# Altium PCB 电路板.PcbDoc
Units mil, origin at the board's own origin, x right, y up, seen from the top; angles counter-clockwise.
Board outline 6000 x 4000 mil, 2 copper layers (Top Layer, Bottom Layer); 2 components, 0 nets, 58 pads, 0 vias.
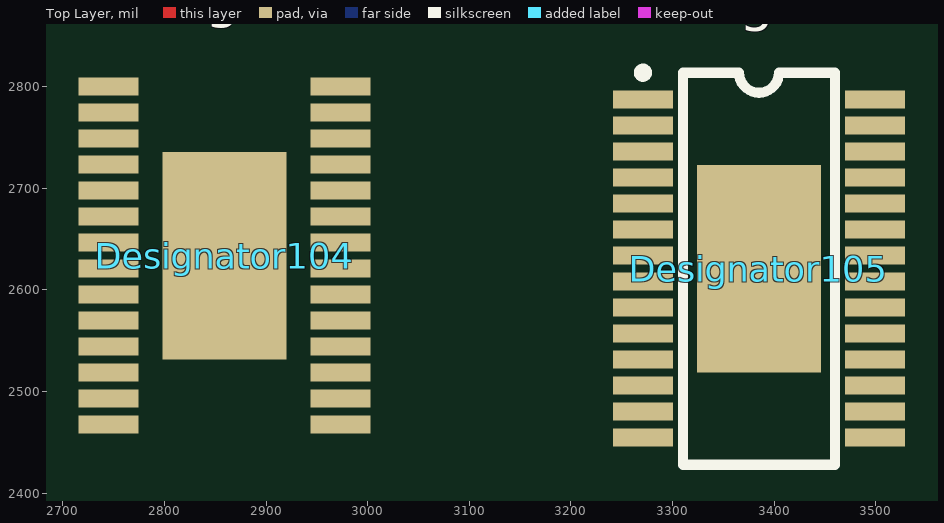
[diagram p0: Top Layer view]
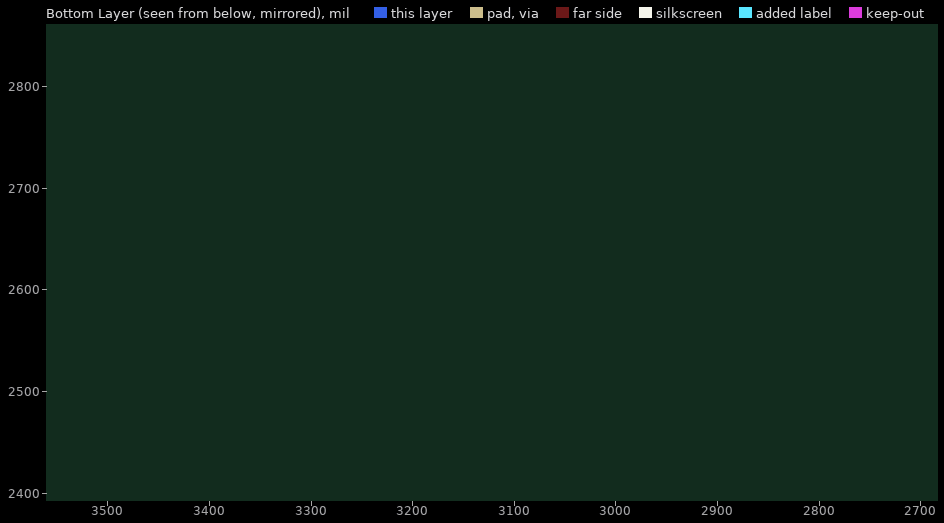
[diagram p1: Bottom Layer view, seen from below]

## Layer stack, top to bottom
Top Solder: solder mask 0.4, Solder Resist, Dk 3.5
Top Layer: signal copper 1.4
Dielectric 1: dielectric 12.6, FR-4, Dk 4.8
Bottom Layer: signal copper 1.4
Bottom Solder: solder mask 0.4, Solder Resist, Dk 3.5

## Board outline
1000,1000 7000,1000 7000,5000 1000,5000

## Design rules (kind name [scope] priority, off if disabled: settings)
Clearance [All] p1: gap=10 ignorepadtopadclearanceinfootprint=FALSE except(0: Arc-Hole Track-Hole SMDPad-Hole THPad-Hole Via-Hole Fill-Hole Poly-Hole Region-Hole Text-Hole)
PolygonConnect [All] p1: connectstyle=Relief reliefconductorwidth=10 reliefentries=4 polygonreliefangle="90 Angle" airgapwidth=10
RoutingVias [All] p1: holewidth=28 width=50 viastyle="Through Hole" minholewidth=28 minwidth=50 maxholewidth=28 maxwidth=50
SolderMaskExpansion [All] p1: expansion=4
Width [All] p1: maxlimit=10 minlimit=10 preferedwidth=10
30 further rules are at their usual default settings.

## Components (designator, comment, footprint, x,y, rotation, side; value= is the part's Value field where it differs from the comment)
Designator104 "Comment" TSSOP28-PowerPad#1 2745,2800 r0 top
Designator105 "Comment" TSSOP28-PowerPad#2 3385,2620.87 r0 top

## Footprints (in the part's own frame and the unit in brackets; to place one, negate y for a bottom-side part, rotate by r counter-clockwise, add the part's x,y. Pads: shape width x height; smd on the part's side, far side on the other; paste and mask are expansions set on the pad)
TSSOP28-PowerPad#1 [mm]
  rect 1.5x0.45 smd: 1(0,0) 2(0,-0.65) 3(0,-1.3) 4(0,-1.95) 5(0,-2.6) 6(0,-3.25) 7(0,-3.9) 8(0,-4.55) 9(0,-5.2) 10(0,-5.85) 11(0,-6.5) 12(0,-7.15) 13(0,-7.8) 14(0,-8.45) 15(5.8,-8.45) 16(5.8,-7.8) 17(5.8,-7.15) 18(5.8,-6.5) 19(5.8,-5.85) 20(5.8,-5.2) 21(5.8,-4.55) 22(5.8,-3.9) 23(5.8,-3.25) 24(5.8,-2.6) 25(5.8,-1.95) 26(5.8,-1.3) 27(5.8,-0.65) 28(5.8,0)
  rect 3.1x5.18 smd: 29(2.9,-4.225)
  body extent -0.3,-9.12 6.1,0.68, height 1.03
TSSOP28-PowerPad#2 [mm]
  rect 1.5x0.45 smd: 1(-2.9,4.225) 2(-2.9,3.575) 3(-2.9,2.925) 4(-2.9,2.275) 5(-2.9,1.625) 6(-2.9,0.975) 7(-2.9,0.325) 8(-2.9,-0.325) 9(-2.9,-0.975) 10(-2.9,-1.625) 11(-2.9,-2.275) 12(-2.9,-2.925) 13(-2.9,-3.575) 14(-2.9,-4.225) 15(2.9,-4.225) 16(2.9,-3.575) 17(2.9,-2.925) 18(2.9,-2.275) 19(2.9,-1.625) 20(2.9,-0.975) 21(2.9,-0.325) 22(2.9,0.325) 23(2.9,0.975) 24(2.9,1.625) 25(2.9,2.275) 26(2.9,2.925) 27(2.9,3.575) 28(2.9,4.225)
  rect 3.1x5.18 smd: 29(0,0)
  silkscreen extent -3,-4.9 1.9,5, body extent -3.2,-4.9 3.2,4.9, height 1.03

## Nets (pads, with @x,y where several pads share a name; then routed paths per layer and width w, separated by ;. In a path a pad name is that pad's centre, name@x,y a point inside that pad or via, vN(x,y) a via of type N, cw(c..) or ccw(c..) an arc to the next point about the centre after c; other vN are vias at no path point)
pads on no net: Designator104.1 Designator104.2 Designator104.3 Designator104.4 Designator104.5 Designator104.6 Designator104.7 Designator104.8 Designator104.9 Designator104.10 Designator104.11 Designator104.12 Designator104.13 Designator104.14 Designator104.15 Designator104.16 Designator104.17 Designator104.18 Designator104.19 Designator104.20 Designator104.21 Designator104.22 Designator104.23 Designator104.24 Designator104.25 Designator104.26 Designator104.27 Designator104.28 Designator104.29 Designator105.1 Designator105.2 Designator105.3 Designator105.4 Designator105.5 Designator105.6 Designator105.7 Designator105.8 Designator105.9 Designator105.10 Designator105.11 Designator105.12 Designator105.13 Designator105.14 Designator105.15 Designator105.16 Designator105.17 Designator105.18 Designator105.19 Designator105.20 Designator105.21 Designator105.22 Designator105.23 Designator105.24 Designator105.25 Designator105.26 Designator105.27 Designator105.28 Designator105.29